# Altium PCB MB1360.PcbDoc (part 1 of 3)
Units mil, origin at the board's own origin, x right, y up, seen from the top; angles counter-clockwise.
Board outline 2760.94 x 3253.06 mil, 2 copper layers (Top Layer, Bottom Layer), stack 61.811 mil thick; 138 components, 141 nets, 535 pads, 416 vias.
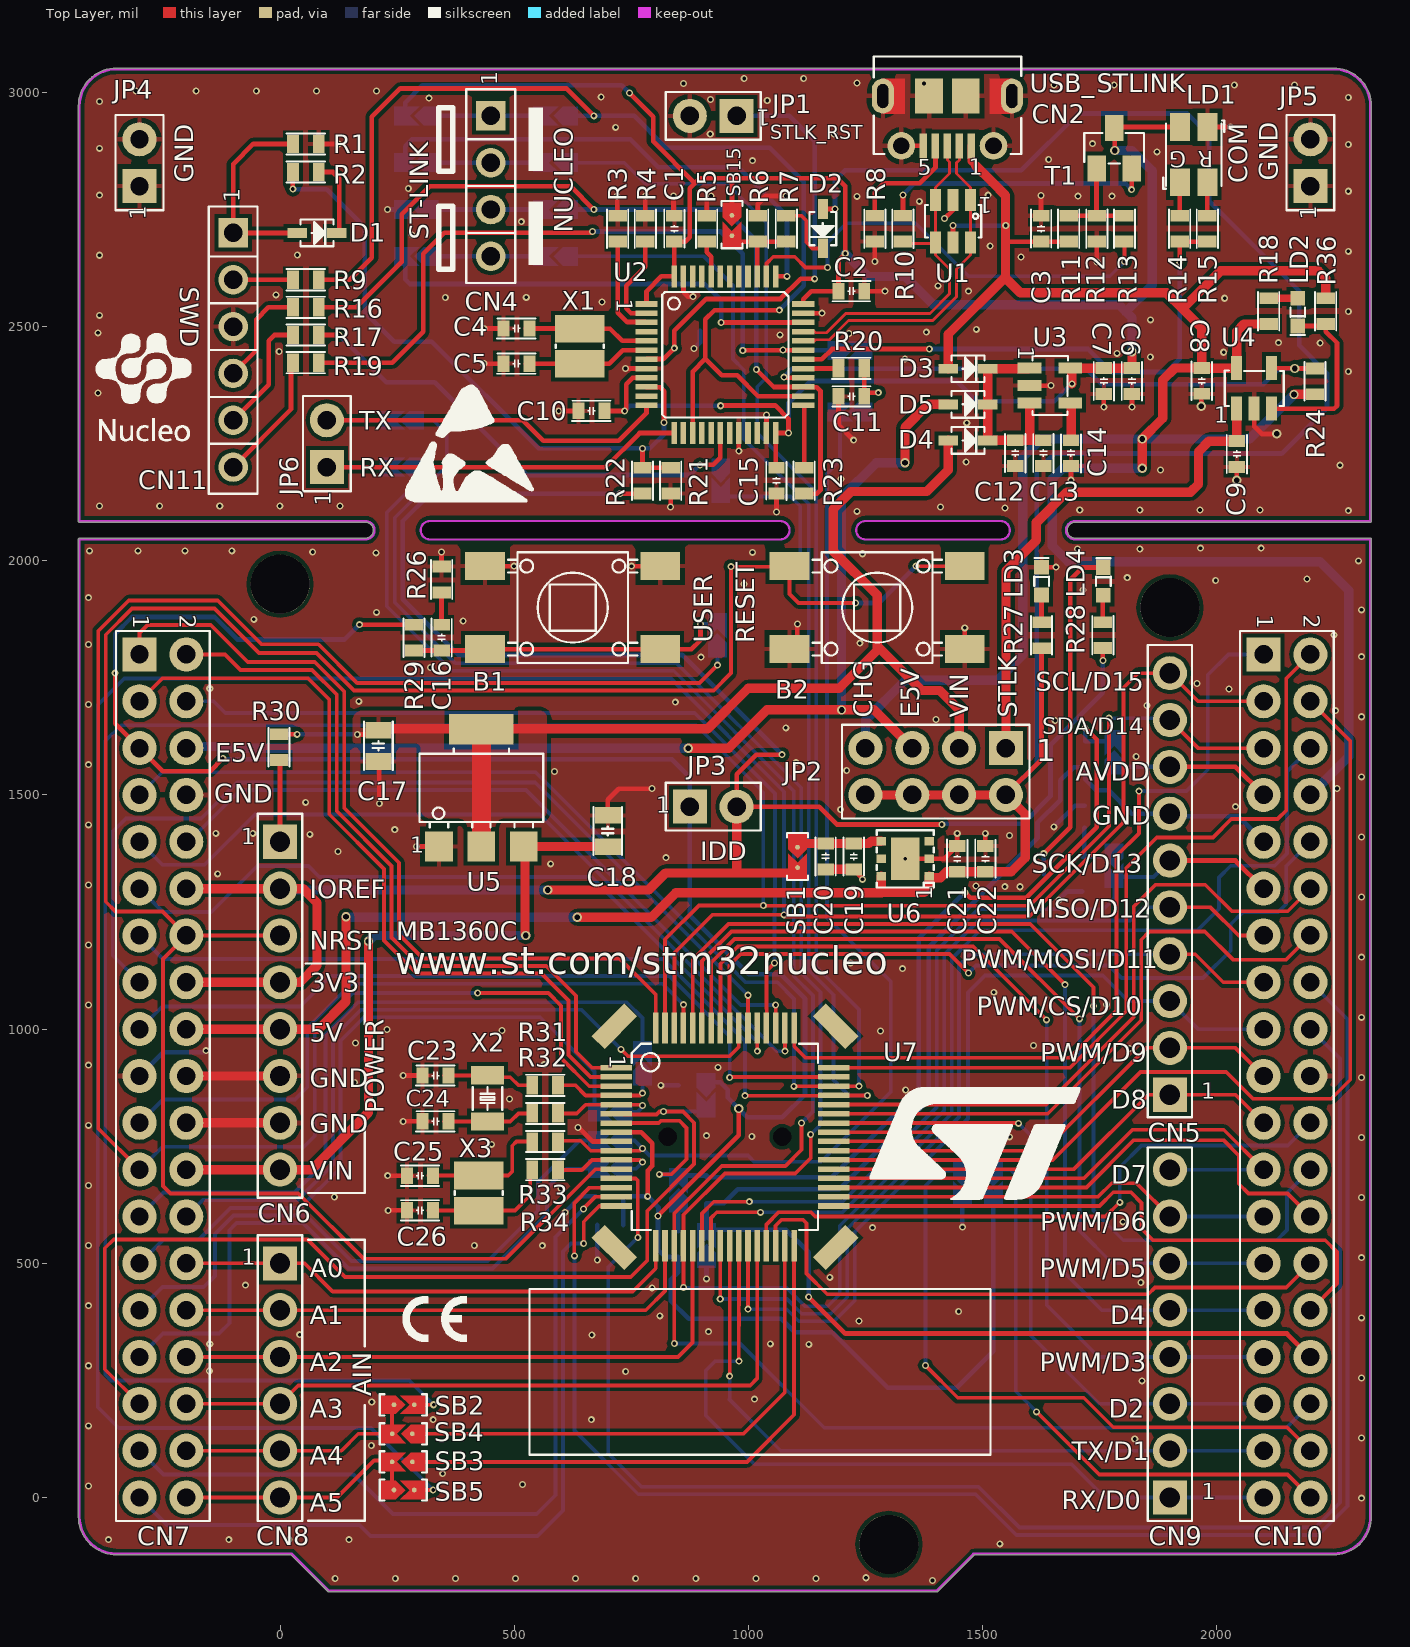
[diagram p0: Top Layer view]
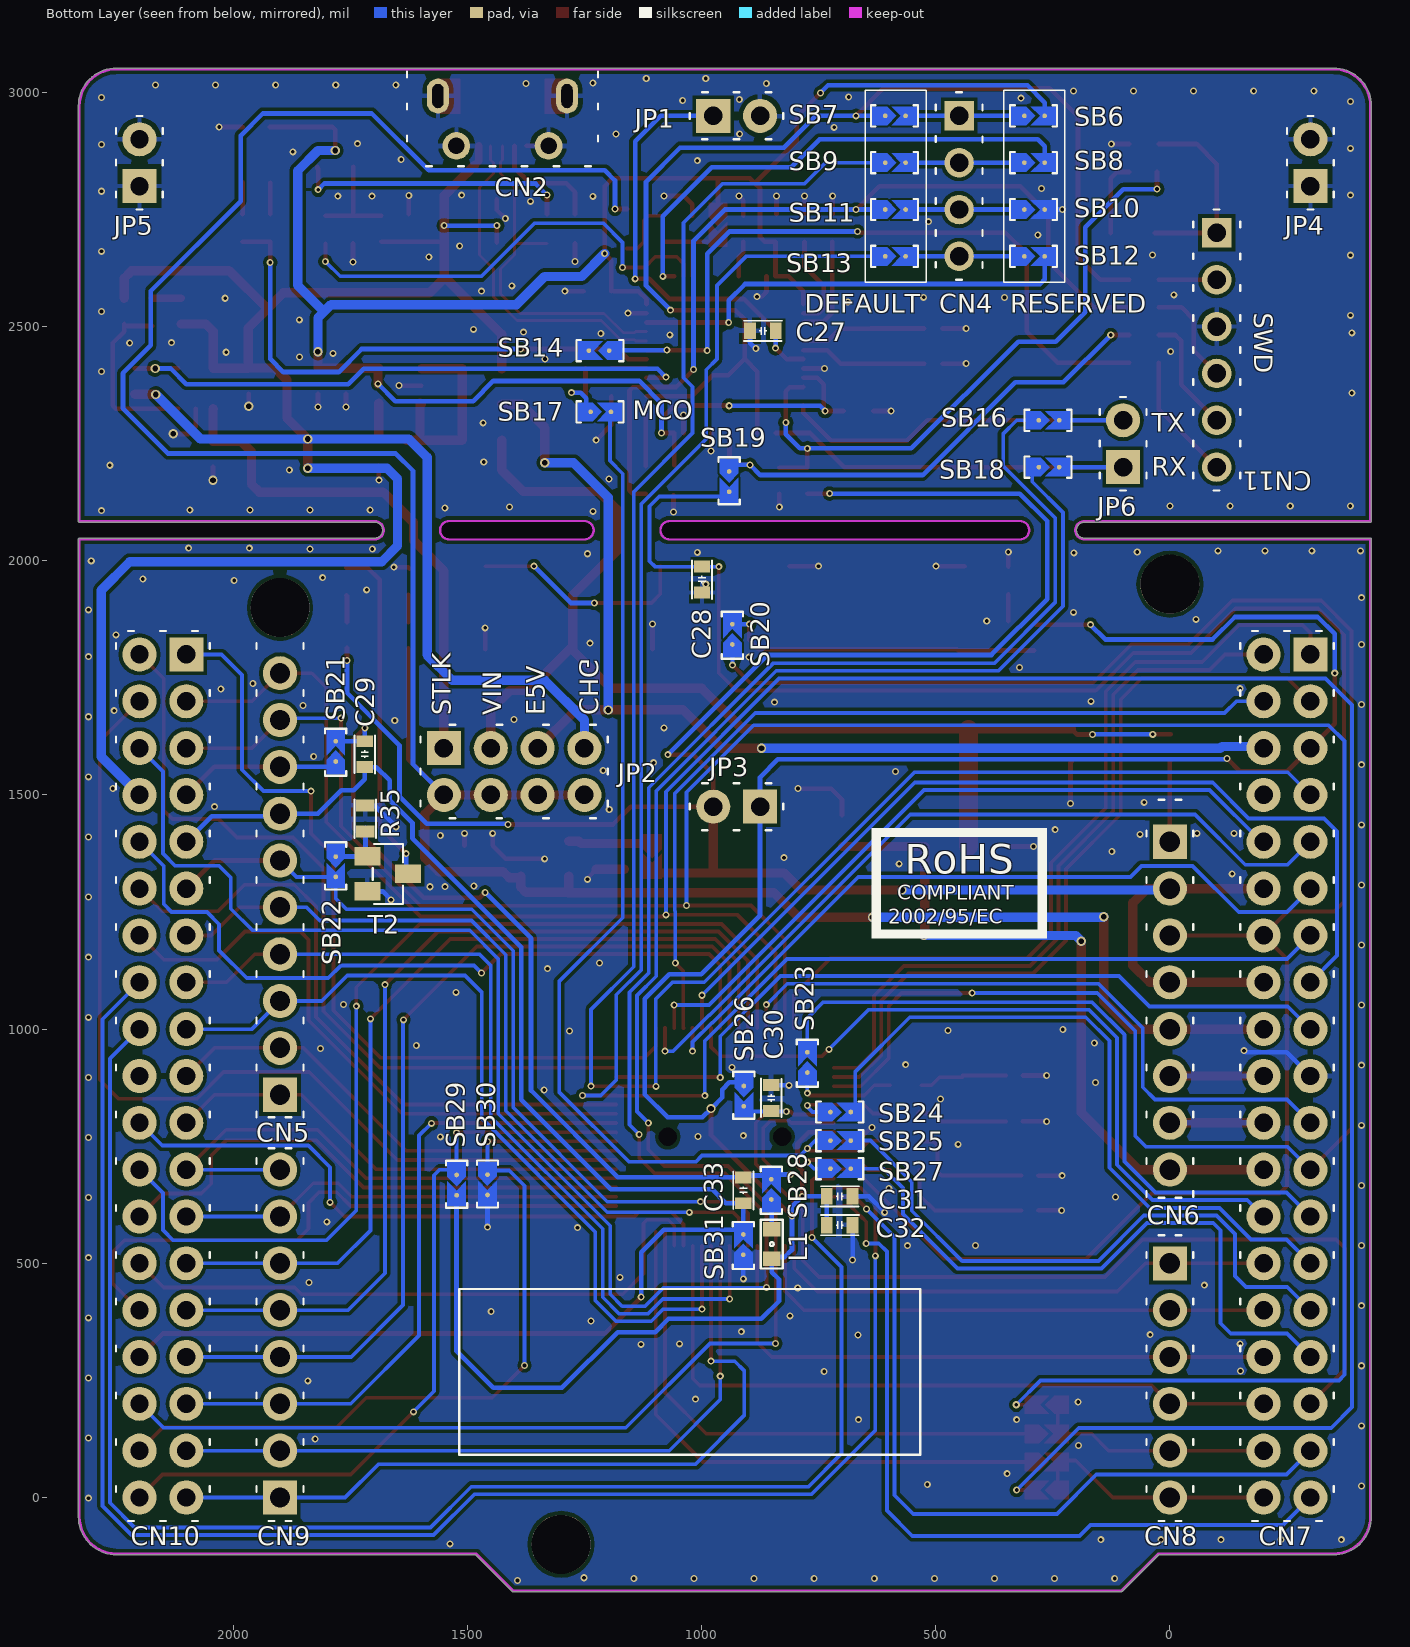
[diagram p1: Bottom Layer view, seen from below]
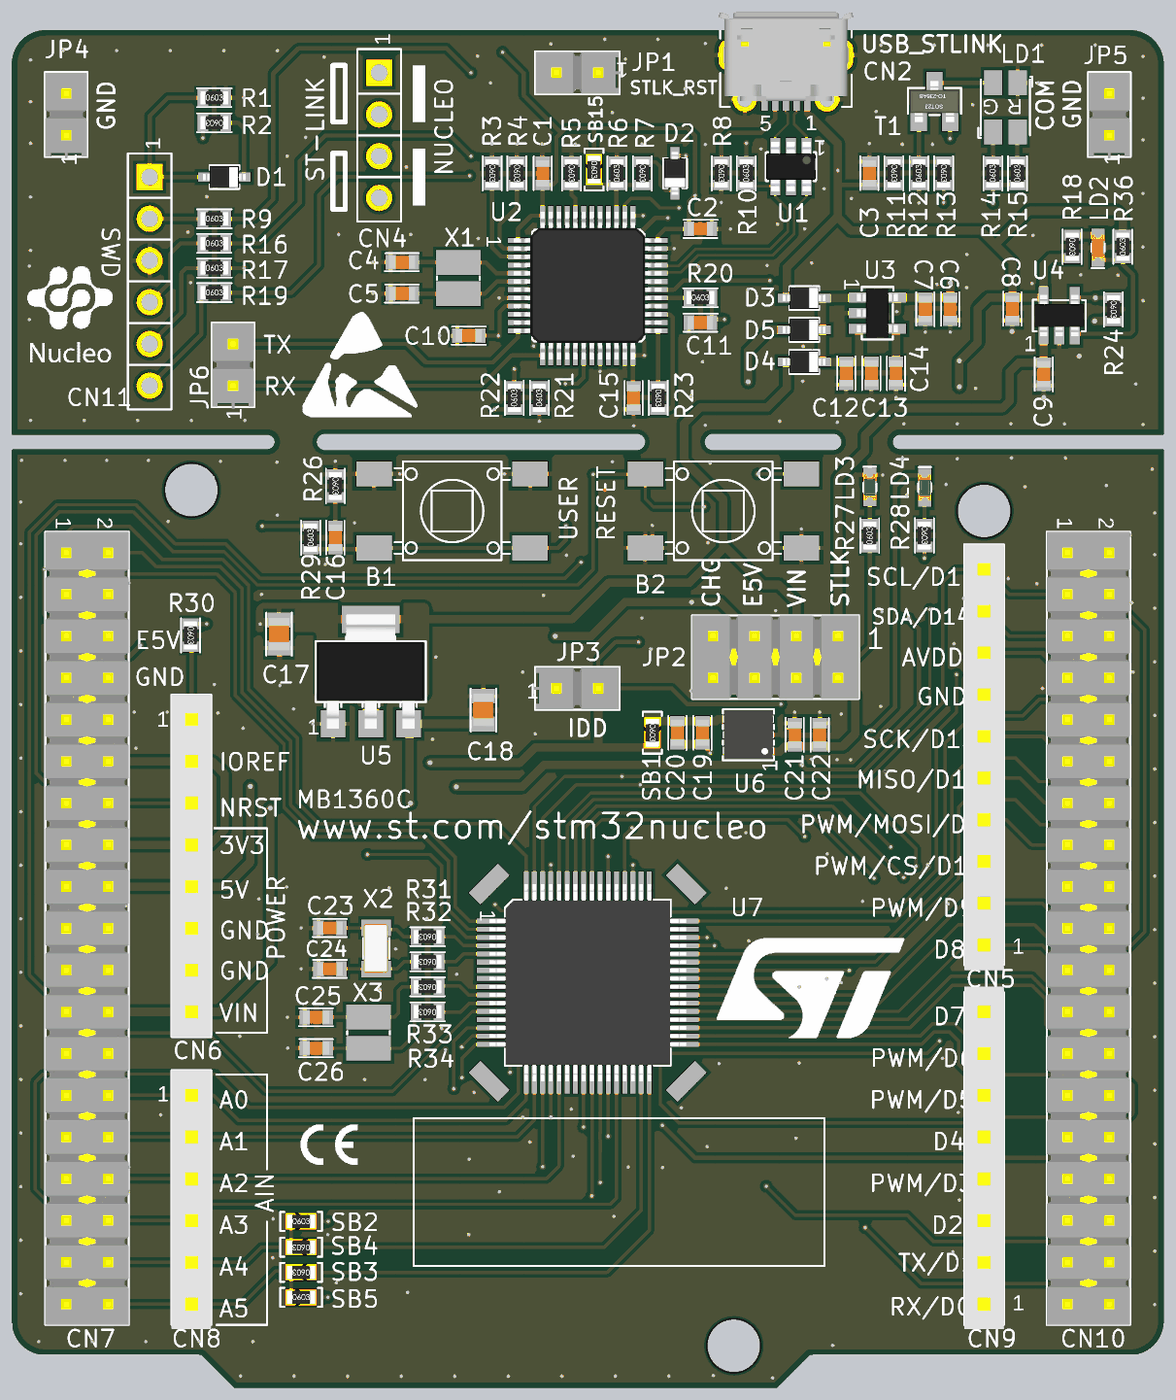
[diagram p3: 3D render of the assembled board from above, using the file's embedded part models]
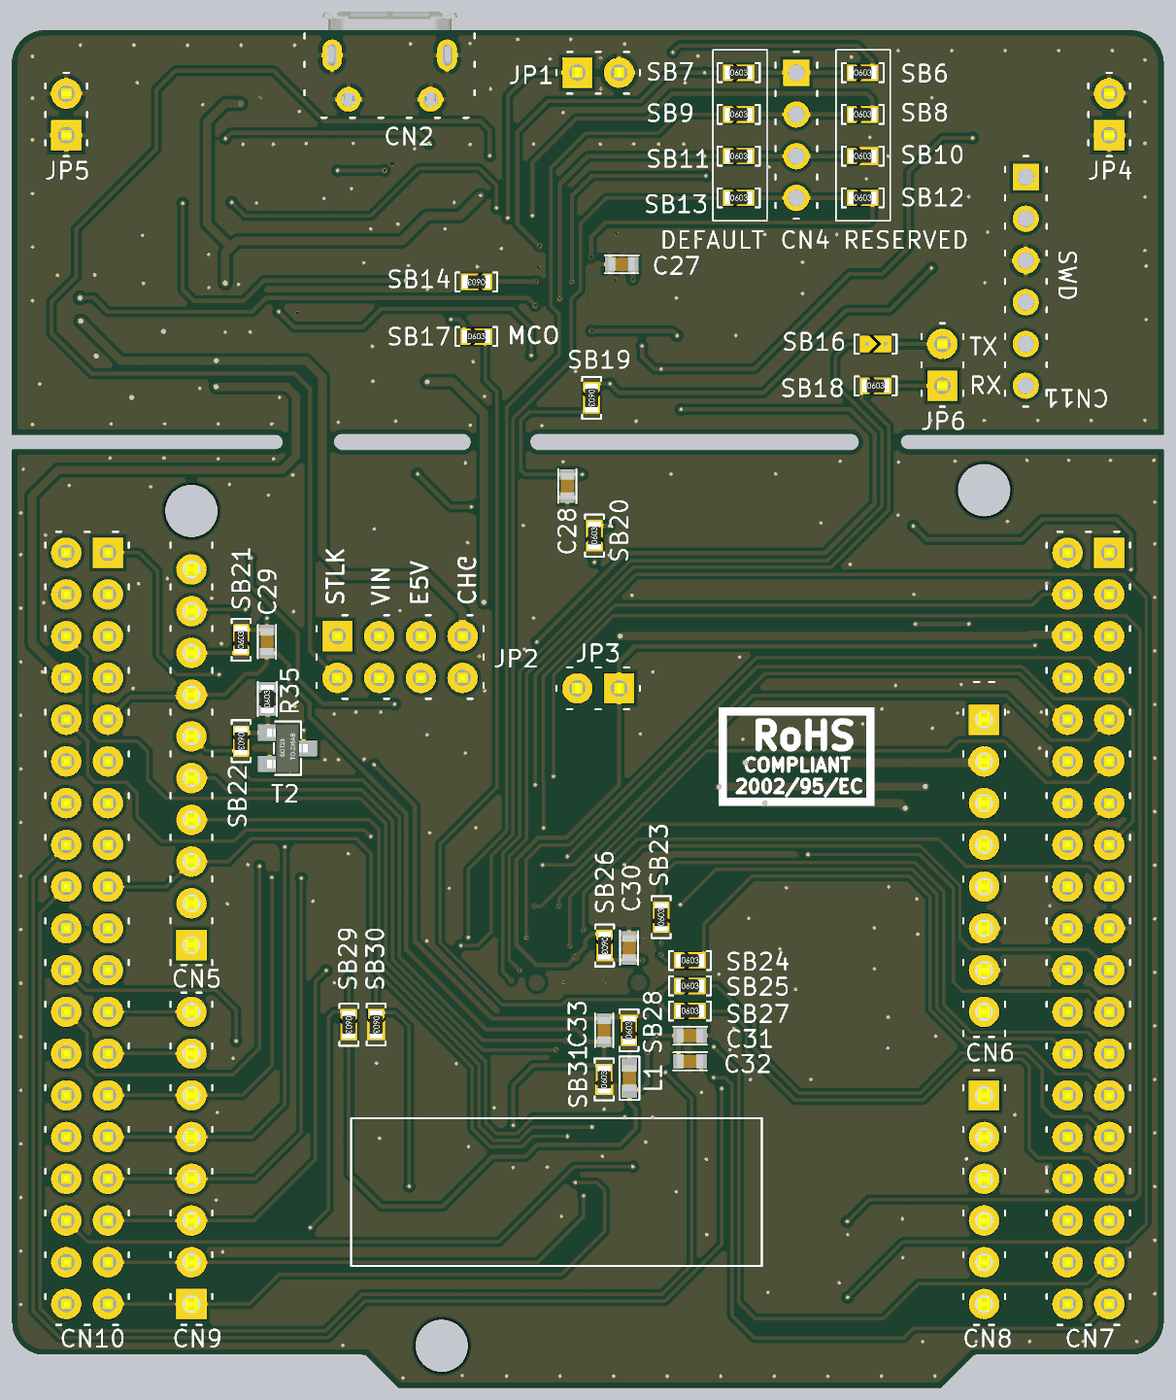
[diagram p4: 3D render of the assembled board from below, using the file's embedded part models]

## Layer stack, top to bottom
Top Solder: solder mask 0.5906, Solder Resist, Dk 3.5
Top Layer: signal copper 1.378
Dielectric1: dielectric 59.0551, FR-4, Dk 4.8
Bottom Layer: signal copper 1.378
Bottom Solder: solder mask 0.5906, Solder Resist, Dk 3.5

## Board outline
-430.46,-40.95 ccw(c-349.21,-40.95) -349.21,-122.2 ccw(c-349.21,-119.69) -349.17,-122.2 23.77,-122.2 101.77,-200.2 ccw(c103.55,-198.43) 103.55,-200.94 1402.76,-200.94 ccw(c1402.76,-198.43) 1404.54,-200.2 1404.55,-200.19 cw(c1402.76,-198.43) 1404.53,-200.21 1482.54,-122.2 2249.22,-122.2 ccw(c2249.22,-40.95) 2330.47,-40.95 2330.47,2045.67 ccw(c2327.96,2045.67) 2327.96,2048.18 1698.04,2048.18 cw(c1698.04,2065.35) 1698.04,2082.52 2327.93,2082.52 ccw(c2327.96,2085.04) 2330.47,2085.04 2330.47,2970.87 ccw(c2249.22,2970.87) 2249.24,3052.12 ccw(c2249.22,2970.87) 2249.22,3052.12 cw(c2249.22,3049.61) 2249.24,3052.12 2249.22,3052.12 -349.21,3052.12 ccw(c-349.21,3049.61) -349.23,3052.12 cw(c-349.21,2970.87) -349.21,3052.12 -349.23,3052.12 ccw(c-349.21,2970.87) -430.46,2970.87 -430.46,2085.04 ccw(c-427.95,2085.04) -427.92,2082.52 182.29,2082.52 cw(c182.29,2065.35) 199.46,2065.35 cw(c182.29,2065.35) 182.29,2048.18 -427.95,2048.18 ccw(c-427.95,2045.67) -430.46,2045.65
cut-out: 320.08,2045.67 1068.11,2045.67 ccw(c1068.11,2065.35) 1068.11,2085.04 320.08,2085.04 ccw(c320.08,2065.35)
cut-out: 1250,2045.67 1538.59,2045.67 ccw(c1538.59,2065.35) 1538.59,2085.04 1250,2085.04 ccw(c1250,2065.35)

## Design rules (kind name [scope] priority, off if disabled: settings)
Clearance SB [(HasFootprint('SOLDER-BRIDGE_R0603-0R'))] p1: gap=5 ignorepadtopadclearanceinfootprint=FALSE except(0: Arc-Hole Track-Hole SMDPad-Hole THPad-Hole Via-Hole Fill-Hole Poly-Hole Region-Hole Text-Hole)
Clearance U2 [(ObjectKind = 'Pad') And (Component = 'U2') vs (ObjectKind = 'Pad') And (Component = 'U2')] p2: gap=7.8 ignorepadtopadclearanceinfootprint=FALSE except(0: Arc-Hole Track-Hole SMDPad-Hole THPad-Hole Via-Hole Fill-Hole Poly-Hole Region-Hole Text-Hole)
Clearance U7 [(ObjectKind = 'Pad') And (Component = 'U7') vs (ObjectKind = 'Pad') And (Component = 'U7')] p3: gap=7.8 ignorepadtopadclearanceinfootprint=FALSE except(0: Arc-Hole Track-Hole SMDPad-Hole THPad-Hole Via-Hole Fill-Hole Poly-Hole Region-Hole Text-Hole)
Clearance [All] p4: gap=8 ignorepadtopadclearanceinfootprint=FALSE except(0: Arc-Hole Track-Hole SMDPad-Hole THPad-Hole Via-Hole Fill-Hole Poly-Hole Region-Hole Text-Hole)
ComponentClearance [All] p1: gap=7.87 collisioncheckmode=3 verticalgap=7.87 showdistances=FALSE
DiffPairsRouting [All] p1: maxlimit=8.9 minlimit=8.9 mostfreqgap=8.9 toplayer_minwidth=15 toplayer_maxwidth=15 toplayer_prefwidth=15 bottomlayer_minwidth=15 bottomlayer_maxwidth=15 bottomlayer_prefwidth=15 maxuncoupledlength=500
HoleSize [All] p1: absolutevalues=TRUE maxlimit=150 minlimit=1 maxpercent=80.000 minpercent=20.000
MinimumSolderMaskSliver [All] p1: minsoldermaskwidth=0
PolygonConnect VIA [IsVia] p1: connectstyle=Direct reliefconductorwidth=10 reliefentries=4 polygonreliefangle="90 Angle" airgapwidth=10
PolygonConnect [All] p2: connectstyle=Relief reliefconductorwidth=10 reliefentries=4 polygonreliefangle="90 Angle" airgapwidth=10
RoutingVias [All] p1: holewidth=12 width=20 viastyle="Through Hole" minholewidth=8 minwidth=15 maxholewidth=28 maxwidth=50
SilkToSilkClearance [All] p1: silktosilkclearance=4
SilkToSolderMaskClearance [IsPad] p1: minsilkscreentomaskgap=0.5 clearancetoexposedcopper=TRUE
SolderMaskExpansion [All] p1: expansion=4
Width [All] p1: maxlimit=40 minlimit=6 preferedwidth=10 minimp=50.000000 maximp=50.000000 favimp=50.000000
24 further rules are at their usual default settings.

## Classes and differential pairs
net class PF[0..2]: PF0 PF1 PF2 PF3 PF4
net class PD[0..9]: PD0 PD1 PD2 PD3 PD4 PD5 PD6 PD7 PD8 PD9
net class PC[0..15]: PC0 PC1 PC2 PC3 PC4 PC5 PC6 PC7 PC8 PC9 PC10 PC11 PC12 PC13 PC14 PC15
net class PB[0..15]: PB0 PB1 PB2 PB3 PB4 PB5 PB6 PB7 PB8 PB9 PB10 PB11 PB12 PB13 PB14 PB15
net class PA[0..15]: PA0 PA1 PA2 PA3 PA4 PA5 PA6 PA7 PA8 PA9 PA10 PA11 PA12 PA13 PA14 PA15
component class Power: C17 C18 C19 C20 C21 C22 HW12 HW13 JP2 JP3 LD3 R27 SB1 U5 U6
component class ST_LINK_V2-1: C1 C2 C3 C4 C5 C6 C7 C8 C9 C10 C11 C12 C13 C14 C15 C27 CN2 CN4 CN10 D1 D2 D3 D4 D5 HW6 HW7 HW8 HW9 JP1 JP4 JP5 JP6 LD1 LD2 R1 R2 R3 R4 R5 R6 R7 R8 R9 R10 R11 R12 R13 R14 R15 R16 R17 R18 R19 R20 R21 R22 R23 R24 R36 SB6 SB7 SB8 SB9 SB10 SB11 SB12 SB13 SB14 SB15 SB16 SB17 SB18 SB19 T1 U1 U2 U3 U4 X1
component class MCU: B1 B2 C16 C23 C24 C25 C26 C28 HW10 HW11 R26 R29 R31 R32 R33 R34 SB20 SB29 SB30 U7 X2 X3
component class Connectors: C29 CN5 CN6 CN7 CN8 CN10 LD4 R28 R30 R35 SB2 SB3 SB4 SB5 SB21 SB22 SB23 SB24 SB25 SB27 T2
component class HW_Mechanical_Parts: HW1 HW2 HW3 HW4 HW5
component class STM32_microcontroller_power: C30 C31 C32 C33 L1 SB26 SB28 SB31
differential pair STL_USB_D: +STL_USB_D_P -STL_USB_D_N

## Components (designator, comment, footprint, x,y, rotation, side; value= is the part's Value field where it differs from the comment)
B1 "SW-PUSH-CMS_BLUE" SWI_WEALTHMETAL_TD-0341_4P_BLUE 625,1900 r270 top locked value=SW_BLUE
B2 "SW-PUSH-CMS_BLACK" SWI_WEALTHMETAL_TD-0341_4P_BLACK 1275,1900 r90 top locked value=SW_BLACK
C1 "Capacitor" C0603 842,2709 r270 top value=100nF
C2 "Capacitor" C0603 1220,2575.68 r180 top value=100nF
C3 "Capacitor" C0603 1625,2709 r270 top value=100nF
C4 "Capacitor" C0603 505,2496 r0 top value=10pF
C5 "Capacitor" C0603 505,2421 r0 top value=10pF
C6 "Capacitor" C0603 1819.02,2383.94 r90 top value=100nF
C7 "Capacitor" C0603 1759.02,2383.94 r90 top value=1uF
C8 "Capacitor" C0603 1968,2384 r270 top value=1uF
C9 "Capacitor" C0603 2043,2228 r90 top value=100nF
C10 "Capacitor" C0603 665,2320 r0 top value=100nF
C11 "N/A" C0603 1220,2351 r180 top value=20pF
C12 "Capacitor" C0603 1569.87,2230 r90 top value=100nF
C13 "Capacitor" C0603 1629.87,2230 r90 top value=1uF
C14 "Capacitor" C0603 1688.87,2229.94 r90 top value=10nF
C15 "Capacitor" C0603 1060,2171 r90 top value=100nF
C16 "Capacitor" C0603 345,1836 r270 top value=100nF
C17 "Capacitor" C0805 210,1605 r90 top value=10uF
C18 "Capacitor" C0805 700,1423 r270 top value=10uF
C19 "Capacitor" C0603 1225,1368.69 r90 top value=1uF
C20 "Capacitor" C0603 1165,1368.69 r90 top value=100nF
C21 "Capacitor" C0603 1446,1363.69 r270 top value=100nF
C22 "Capacitor" C0603 1506,1363.69 r270 top value=1uF
C23 "Capacitor" C0603 332,901 r0 top value=5.6pF
C24 "Capacitor" C0603 332,803 r0 top value=5.6pF
C25 "N/A" C0603 299,687 r0 top value=10pF
C26 "N/A" C0603 299,613 r0 top value=10pF
C27 "Capacitor" C0603 869,2491 r0 bottom value=100nF
C28 "Capacitor" C0603 999,1959.97 r90 bottom value=100nF
C29 "N/A" C0603 1719,1587.06 r90 bottom value=100nF
C30 "Capacitor" C0603 851,852.94 r270 bottom value=1uF
C31 "Capacitor" C0603 705,643 r0 bottom value=100nF
C32 "Capacitor" C0603 705,581.62 r0 bottom value=4.7uF
C33 "Capacitor" C0603 910.75,655.97 r90 bottom value=100nF
CN2 "USB_uB_105017.0001" CON_USBMICROB_MOLEX_105017-0001_H2P90 1425,3049.39 r180 top locked value=USB_uB_105017-0001
CN4 "Header 4x1" CON_988-JIUBABA_PHFS25-11-04-G0B115-T-1 450,2800 r90 top
CN5 "Socket 10x1" CON_SAMTEC_SSW-110-03-X-S 1900,1310 r90 top
CN6 "Socket 8x1" CON_SAMTEC_SSW-108-03-X-S 0,1050 r270 top locked
CN7 "Header 19x2" CON_SAMTEC_TSW-119-09-X-D -250,900 r270 top
CN8 "Socket 6x1" CON_SAMTEC_SSW-106-03-X-S 0,250 r270 top
CN9 "Socket 8x1" CON_SAMTEC_SSW-108-03-X-S 1900,350 r90 top
CN10 "Header 19x2" CON_SAMTEC_TSW-119-09-X-D 2150,900 r270 top
CN11 "Header 6x1" CON_988-JIUBABA_PHFS25-11-06-G0B115-T-1 -100,2450 r90 top locked value="Header 1x6"
D1 "BAT60JFILM" DIO_SOD323 79,2700 r0 top
D2 "BAT60JFILM" DIO_SOD323 1159,2709 r270 top
D3 "BAT60JFILM" DIO_SOD323 1469,2410 r0 top locked
D4 "BAT60JFILM" DIO_SOD323 1469,2257 r0 top
D5 "BAT60JFILM" DIO_SOD323 1469,2334 r0 top
JP1 "Jumper Header 2x1" CON_SAMTEC_TSW-102-07-G-S 925,2950 r180 top value=Jumper_Header_2x1
JP2 "Shunt Fitted 1-2" CON_SAMTEC_TSW-104-07-X-D 1400,1550 r180 top
JP3 "Shunt Fitted" CON_SAMTEC_TSW-102-07-G-S 925,1475 r0 top
JP4 "Shunt Fitted" CON_SAMTEC_TSW-102-07-G-S -300,2850 r90 top locked
JP5 "Shunt Fitted" CON_SAMTEC_TSW-102-07-G-S 2200,2850 r90 top locked
JP6 "Jumper Header 2x1" CON_SAMTEC_TSW-102-07-G-S 100,2250 r90 top locked value=Jumper_Header_2x1
L1 "BEAD" L0603 850,541 r90 bottom value=600R@100MHz
LD1 "LD_BICOLOR_CMS" LED_BI-GR_HSMF-A201-A00J1 1951,2867 r180 top locked
LD2 "LED_red" LED_0603_RED 2173,2531 r270 top value=RED
LD3 "LED_green" LED_0603_GREEN 1626,1956.7 r90 top value=GREEN
LD4 "LED_green" LED_0603_GREEN 1758,1956 r90 top value=GREEN
R1 "Resistor" R0603 55,2890 r0 top value=10K
R2 "N/A" R0603 55,2830 r180 top value=22R
R3 "N/A" R0603 721,2709 r270 top value=10K
R4 "Resistor" R0603 780,2709 r270 top value=10K
R5 "Resistor" R0603 911,2709 r270 top value=100K
R6 "Resistor" R0603 1020,2709 r90 top value=4K7
R7 "Resistor" R0603 1081,2709 r270 top value=2K7
R8 "Resistor" R0603 1270,2709 r270 top value=100K
R9 "Resistor" R0603 55,2600 r0 top value=22R
R10 "Resistor" R0603 1330,2709 r90 top value=1K5
R11 "Resistor" R0603 1684,2709 r270 top value=10K
R12 "Resistor" R0603 1744,2709 r90 top value=36K
R13 "Resistor" R0603 1803,2709 r270 top value=100R
R14 "Resistor" R0603 1921,2709 r90 top value=330R
R15 "Resistor" R0603 1980,2709 r90 top value=330R
R16 "Resistor" R0603 55,2541 r0 top value=22R
R17 "Resistor" R0603 55,2482 r0 top value=22R
R18 "Resistor" R0603 2111,2533 r270 top value=1K
R19 "Resistor" R0603 55,2423 r0 top value=22R
R20 "Resistor" R0603 1220,2411 r0 top value=100R
R21 "Resistor" R0603 834,2171 r90 top value=4K7
R22 "Resistor" R0603 774,2171 r90 top value=4K7
R23 "Resistor" R0603 1119,2171 r270 top value=100R
R24 "Resistor" R0603 2210,2383 r270 top value=47K
R26 "Resistor" R0603 345,1960 r270 top value=100R
R27 "Resistor" R0603 1626,1841 r90 top value=1K
R28 "Resistor" R0603 1757,1841.3 r270 top value=510R
R29 "Resistor" R0603 286,1836 r90 top value=4K7
R30 "Resistor" R0603 -2,1602 r270 top value=1K
R31 "Resistor" R0603 566,880 r180 top value=0R
R32 "Resistor" R0603 566,820 r180 top value=0R
R33 "N/A" R0603 566,760 r180 top locked value=100R
R34 "N/A" R0603 566,700 r180 top locked value=100R
R35 "Resistor" R0603 1718,1449.62 r90 bottom value=1M
R36 "Resistor" R0603 2232.64,2533 r90 top value=47K
SB1 "SB_ON" SOLDER-BRIDGE_R0603-0R 1105,1368.69 r270 top
SB2 "SB_OFF" SOLDER-BRIDGE_R0603-0R 263,198 r0 top
SB3 "SB_ON" SOLDER-BRIDGE_R0603-0R 263,76 r180 top
SB4 "SB_ON" SOLDER-BRIDGE_R0603-0R 263,136 r180 top
SB5 "SB_OFF" SOLDER-BRIDGE_R0603-0R 263,16 r0 top
SB6 "SB_OFF" SOLDER-BRIDGE_R0603-0R 291,2950 r180 bottom
SB7 "SB_ON" SOLDER-BRIDGE_R0603-0R 588,2950 r180 bottom
SB8 "SB_OFF" SOLDER-BRIDGE_R0603-0R 291,2850 r180 bottom locked
SB9 "SB_ON" SOLDER-BRIDGE_R0603-0R 588,2850 r180 bottom
SB10 "SB_OFF" SOLDER-BRIDGE_R0603-0R 291,2750 r180 bottom locked
SB11 "SB_ON" SOLDER-BRIDGE_R0603-0R 588,2750 r180 bottom
SB12 "SB_OFF" SOLDER-BRIDGE_R0603-0R 291,2650 r180 bottom
SB13 "SB_ON" SOLDER-BRIDGE_R0603-0R 588,2650 r180 bottom
SB14 "SB_ON" SOLDER-BRIDGE_R0603-0R 1216.85,2448.76 r0 bottom
SB15 "SB_OFF" SOLDER-BRIDGE_R0603-0R 965,2717.72 r270 top
SB16 "SB_ON" SOLDER-BRIDGE_R0603-0R 260,2300 r180 bottom
SB17 "SB_ON" SOLDER-BRIDGE_R0603-0R 1217,2318 r180 bottom
SB18 "SB_ON" SOLDER-BRIDGE_R0603-0R 260,2200 r180 bottom
SB19 "SB_ON" SOLDER-BRIDGE_R0603-0R 941,2171 r270 bottom
SB20 "SB_ON" SOLDER-BRIDGE_R0603-0R 934.11,1841 r90 bottom
SB21 "SB_OFF" SOLDER-BRIDGE_R0603-0R 1781,1591.06 r90 bottom
SB22 "SB_ON" SOLDER-BRIDGE_R0603-0R 1781,1348.62 r270 bottom
SB23 "SB_OFF" SOLDER-BRIDGE_R0603-0R 774,927 r90 bottom
SB24 "SB_OFF" SOLDER-BRIDGE_R0603-0R 705,823 r180 bottom
SB25 "SB_ON" SOLDER-BRIDGE_R0603-0R 705,762 r180 bottom
SB26 "SB_ON" SOLDER-BRIDGE_R0603-0R 909.76,858.94 r270 bottom
SB27 "SB_ON" SOLDER-BRIDGE_R0603-0R 705,702 r180 bottom
SB28 "SB_ON" SOLDER-BRIDGE_R0603-0R 851,656 r90 bottom
SB29 "SB_OFF" SOLDER-BRIDGE_R0603-0R 1523,669 r270 bottom
SB30 "SB_OFF" SOLDER-BRIDGE_R0603-0R 1457,669.62 r270 bottom
SB31 "SB_ON" SOLDER-BRIDGE_R0603-0R 910.75,537.97 r90 bottom locked
T1 "9013-SOT23" NPN_SOT23 1781,2881 r0 top locked
T2 "BSN20" MOS_SOT23 1669.69,1331.4 r270 bottom
U1 "USBLC6-2SC6" ESD_SOT23-6L 1437,2725 r180 top locked
U2 "STM32F103CBT6" ICC_LQFP48_7X7_P050 950,2440 r270 top locked
U3 "LDK120M33R" REG_SOT23-5L 1644,2374 r270 top locked
U4 "DFN8 and SO8 are mixed in a single footprint allowing to swap according to components availability" MOS_SOT23-5L 2080,2368 r0 top value=STMPS2141STR
U5 "LD1117S50TR" REG_SOT223-TAB 430,1515 r0 top locked
U6 "LDL112PV33R" ICC_DFN6-EPAD_3X3_P095 1335,1363.69 r90 top
U7 "STM32G071RBT6" ICC_LQFP64_10X10_P050_SOCKET_YAMAICHI_IC149-064-069-B5 950,770 r270 top locked
X1 "XTAL_8M_NX3225GD" CRY_NX3225GD_2P 640,2458 r270 top locked value=NX3225GD-8.00M
X2 "XTAL_32K_NX3215SA" CRY_NX3215SA_2P 443,852 r90 top value=NX3215SA-32.768K
X3 "N/A" CRY_NX3225GD_2P 424.5,650 r90 top value=NX3225GD-8.00M

## Footprints (in the part's own frame and the unit in brackets; to place one, negate y for a bottom-side part, rotate by r counter-clockwise, add the part's x,y. Pads: shape width x height; smd on the part's side, far side on the other; paste and mask are expansions set on the pad)
C0603 [mm]
  rect 0.64x0.89 smd mask+0.05: 1(-0.7,0) 2(0.7,0)
  silkscreen extent -1.05,-0.55 1.02,0.55, body extent -0.9,-0.5 0.9,0.5, height 1.4
C0805 [mm]
  rect 0.9x1.4 smd mask+0.05: 1(-0.85,0) 2(0.85,0)
  silkscreen extent -1.3,-0.77 1.3,0.77, body extent -1.1,-0.7 1.1,0.7, height 1.35
CON_988-JIUBABA_PHFS25-11-04-G0B115-T-1 [mm]
  rect 1.6x1.6 hole 1 mask+0.05: 1(3.81,0)
  round 1.6 hole 1 mask+0.05: 2(1.27,0) 3(-1.27,0) 4(-3.81,0)
  silkscreen extent -5.25,-1.33 5.25,1.33, body extent -5.25,-1.33 5.25,1.33, height 8.85
CON_988-JIUBABA_PHFS25-11-06-G0B115-T-1 [mm]
  rect 1.6x1.6 hole 1 mask+0.05: 1(6.35,0)
  round 1.6 hole 1 mask+0.05: 2(3.81,0) 3(1.27,0) 4(-1.27,0) 5(-3.81,0) 6(-6.35,0)
  silkscreen extent -7.79,-1.33 7.79,1.33, body extent -7.79,-1.33 7.79,1.33, height 8.85
CON_SAMTEC_SSW-106-03-X-S [mm]
  rect 1.85x1.85 / inner round 1.85 / far side rect 1.85x1.85 hole 1.1 mask+0.05: 1(-6.35,0)
  round 1.85 hole 1.1 mask+0.05: 2(-3.81,0) 3(-1.27,0) 4(1.27,0) 5(3.81,0) 6(6.35,0)
  silkscreen extent -7.88,-1.2 7.62,1.2, body extent -7.88,-1.21 7.88,1.21, height 8.51
CON_SAMTEC_SSW-108-03-X-S [mm]
  rect 1.85x1.85 / inner round 1.85 / far side rect 1.85x1.85 hole 1.1 mask+0.05: 1(-8.89,0)
  round 1.85 hole 1.1 mask+0.05: 2(-6.35,0) 3(-3.81,0) 4(-1.27,0) 5(1.27,0) 6(3.81,0) 7(6.35,0) 8(8.89,0)
  silkscreen extent -10.42,-1.2 10.42,1.2, body extent -10.42,-1.21 10.42,1.21, height 8.51
CON_SAMTEC_SSW-110-03-X-S [mm]
  rect 1.85x1.85 / inner round 1.85 / far side rect 1.85x1.85 hole 1.1 mask+0.05: 1(-11.43,0)
  round 1.85 hole 1.1 mask+0.05: 2(-8.89,0) 3(-6.35,0) 4(-3.81,0) 5(-1.27,0) 6(1.27,0) 7(3.81,0) 8(6.35,0) 9(8.89,0) 10(11.43,0)
  silkscreen extent -12.65,-1.2 12.96,1.2, body extent -12.96,-1.21 12.96,1.21, height 8.51
CON_SAMTEC_TSW-102-07-G-S [mm]
  rect 1.85x1.85 / inner round 1.85 / far side rect 1.85x1.85 hole 1 mask+0.05: 1(-1.27,0)
  round 1.85 hole 1 mask+0.05: 2(1.27,0)
  silkscreen extent -2.58,-1.3 2.58,1.3, body extent -2.67,-1.3 2.58,1.3, height 8.38
CON_SAMTEC_TSW-104-07-X-D [mm]
  rect 1.85x1.85 / inner round 1.85 / far side rect 1.85x1.85 hole 1 mask+0.05: 1(-3.81,-1.27)
  round 1.85 hole 1 mask+0.05: 2(-3.81,1.27) 3(-1.27,-1.27) 4(-1.27,1.27) 5(1.27,-1.27) 6(1.27,1.27) 7(3.81,-1.27) 8(3.81,1.27)
  silkscreen extent -5.08,-2.54 5.08,2.54, body extent -5.08,-2.54 5.08,2.54, height 8.38
CON_SAMTEC_TSW-119-09-X-D [mm]
  rect 1.85x1.85 / inner round 1.85 / far side rect 1.85x1.85 hole 1 mask+0.05: 1(-22.86,-1.27)
  round 1.85 hole 1 mask+0.05: 2(-22.86,1.27) 3(-20.32,-1.27) 4(-20.32,1.27) 5(-17.78,-1.27) 6(-17.78,1.27) 7(-15.24,-1.27) 8(-15.24,1.27) 9(-12.7,-1.27) 10(-12.7,1.27) 11(-10.16,-1.27) 12(-10.16,1.27) 13(-7.62,-1.27) 14(-7.62,1.27) 15(-5.08,-1.27) 16(-5.08,1.27) 17(-2.54,-1.27) 18(-2.54,1.27) 19(0,-1.27) 20(0,1.27) 21(2.54,-1.27) 22(2.54,1.27) 23(5.08,-1.27) 24(5.08,1.27) 25(7.62,-1.27) 26(7.62,1.27) 27(10.16,-1.27) 28(10.16,1.27) 29(12.7,-1.27) 30(12.7,1.27) 31(15.24,-1.27) 32(15.24,1.27) 33(17.78,-1.27) 34(17.78,1.27) 35(20.32,-1.27) 36(20.32,1.27) 37(22.86,-1.27) 38(22.86,1.27)
  silkscreen extent -24.13,-2.54 24.13,2.54, body extent -24.13,-2.55 24.13,2.54, height 8.38
CON_USBMICROB_MOLEX_105017-0001_H2P90 [mm]
  rect 0.4x1.35 smd mask+0.05: 1(-1.3,4.15) 2(-0.65,4.15) 3(0,4.15) 4(0.65,4.15) 5(1.3,4.15)
  round 1.5 hole 0.9 mask+0.05: 6(-2.5,4.15) 7(2.5,4.15)
  oval 1.2x1.9 hole 0.6 slot 1.3 at 90 deg mask+0.05: 8(3.5,1.45) 9(-3.5,1.45)
  rect 1.5x1.9 smd mask+0.05: 10(-1,1.45) 11(1,1.45)
  Top Layer region: -3.5,2.4 -2.3,2.4 -2.3,0.5 -3.5,0.5 -3.5,2.4
  Top Layer region: 2.3,2.4 3.5,2.4 3.5,0.5 2.3,0.5 2.3,2.4
  silkscreen extent -4,-0.7 4,4.6, body extent -4.1,-1.15 4.1,4.66, height 2.9
CRY_NX3215SA_2P [mm]
  rect 1x1.8 smd mask+0.05: 1(-1.25,0) 2(1.25,0)
  silkscreen extent -0.63,-0.8 0.63,0.8, body extent -1.65,-0.8 1.65,0.8, height 0.9
CRY_NX3225GD_2P [mm]
  rect 1.5x2.7 smd mask+0.05: 1(-0.95,0) 2(0.95,0)
  silkscreen extent -0.1,-1.3 0.1,1.3, body extent -1.65,-1.3 1.65,1.3, height 1
DIO_SOD323 [mm]
  rect 1.06x0.54 smd mask+0.05: 1(-1.07,0) 2(1.07,0)
  silkscreen extent -0.9,-0.72 0.9,0.72, body extent -1.3,-0.78 1.3,0.78, height 1.17
ESD_SOT23-6L [mm]
  rect 0.6x1.2 smd mask+0.05: 1(-0.95,-1.15) 2(0,-1.15) 3(0.95,-1.15) 4(0.95,1.15) 5(0,1.15) 6(-0.95,1.15)
  silkscreen extent -1.53,-0.87 1.53,0.87, body extent -1.52,-1.5 1.52,1.5, height 1.45
ICC_DFN6-EPAD_3X3_P095 [mm]
  rect 0.45x0.5 smd mask+0.05: 1(-0.95,-1.3) 2(0,-1.3) 3(0.95,-1.3) 4(0.95,1.3) 5(0,1.3) 6(-0.95,1.3)
  rect 2.286x1.524 smd mask+0.05: EP(0,0)
  silkscreen extent -1.55,-1.55 1.55,1.55, body extent -1.55,-1.55 1.55,1.55, height 1
ICC_LQFP48_7X7_P050 [mm]
  rect 0.3x1.2 smd mask+0.05: 1(-2.75,-4.25) 2(-2.25,-4.25) 3(-1.75,-4.25) 4(-1.25,-4.25) 5(-0.75,-4.25) 6(-0.25,-4.25) 7(0.25,-4.25) 8(0.75,-4.25) 9(1.25,-4.25) 10(1.75,-4.25) 11(2.25,-4.25) 12(2.75,-4.25) 25(2.75,4.25) 26(2.25,4.25) 27(1.75,4.25) 28(1.25,4.25) 29(0.75,4.25) 30(0.25,4.25) 31(-0.25,4.25) 32(-0.75,4.25) 33(-1.25,4.25) 34(-1.75,4.25) 35(-2.25,4.25) 36(-2.75,4.25)
  rect 1.2x0.3 smd mask+0.05: 13(4.25,-2.75) 14(4.25,-2.25) 15(4.25,-1.75) 16(4.25,-1.25) 17(4.25,-0.75) 18(4.25,-0.25) 19(4.25,0.25) 20(4.25,0.75) 21(4.25,1.25) 22(4.25,1.75) 23(4.25,2.25) 24(4.25,2.75) 37(-4.25,2.75) 38(-4.25,2.25) 39(-4.25,1.75) 40(-4.25,1.25) 41(-4.25,0.75) 42(-4.25,0.25) 43(-4.25,-0.25) 44(-4.25,-0.75) 45(-4.25,-1.25) 46(-4.25,-1.75) 47(-4.25,-2.25) 48(-4.25,-2.75)
  silkscreen extent -3.4,-3.4 3.4,3.45, body extent -4.5,-4.5 4.5,4.5, height 1.6
ICC_LQFP64_10X10_P050_SOCKET_YAMAICHI_IC149-064-069-B5 [mm]
  rect 1x2.5 smd rot 135 mask+0.05: 0(-6,6) 0(6,-6)
  rect 1x2.5 smd rot 45 mask+0.05: 0(-6,-6) 0(6,6)
  round 0.5 hole 1 unplated mask+0.05: 0(0,3.1) 0(0,-3.1)
  rect 0.3x1.7 smd mask+0.05: 1(-3.75,-5.9) 2(-3.25,-5.9) 3(-2.75,-5.9) 4(-2.25,-5.9) 5(-1.75,-5.9) 6(-1.25,-5.9) 7(-0.75,-5.9) 8(-0.25,-5.9) 9(0.25,-5.9) 10(0.75,-5.9) 11(1.25,-5.9) 12(1.75,-5.9) 13(2.25,-5.9) 14(2.75,-5.9) 15(3.25,-5.9) 16(3.75,-5.9) 33(3.75,5.9) 34(3.25,5.9) 35(2.75,5.9) 36(2.25,5.9) 37(1.75,5.9) 38(1.25,5.9) 39(0.75,5.9) 40(0.25,5.9) 41(-0.25,5.9) 42(-0.75,5.9) 43(-1.25,5.9) 44(-1.75,5.9) 45(-2.25,5.9) 46(-2.75,5.9) 47(-3.25,5.9) 48(-3.75,5.9)
  rect 1.7x0.3 smd mask+0.05: 17(5.9,-3.75) 18(5.9,-3.25) 19(5.9,-2.75) 20(5.9,-2.25) 21(5.9,-1.75) 22(5.9,-1.25) 23(5.9,-0.75) 24(5.9,-0.25) 25(5.9,0.25) 26(5.9,0.75) 27(5.9,1.25) 28(5.9,1.75) 29(5.9,2.25) 30(5.9,2.75) 31(5.9,3.25) 32(5.9,3.75) 49(-5.9,3.75) 50(-5.9,3.25) 51(-5.9,2.75) 52(-5.9,2.25) 53(-5.9,1.75) 54(-5.9,1.25) 55(-5.9,0.75) 56(-5.9,0.25) 57(-5.9,-0.25) 58(-5.9,-0.75) 59(-5.9,-1.25) 60(-5.9,-1.75) 61(-5.9,-2.25) 62(-5.9,-2.75) 63(-5.9,-3.25) 64(-5.9,-3.75)
  silkscreen extent -5.05,-5.05 5.05,5.05, body extent -12.5,-12.5 12.5,12.5, height 12.6
L0603 [mm]
  rect 0.8x0.95 smd mask+0.05: 1(-0.8,0) 2(0.8,0)
  silkscreen extent -1.33,-0.6 1.33,0.6, body extent -0.87,-0.47 0.87,0.47, height 0.95
LED_0603_GREEN [mm]
  rect 0.8x0.8 smd mask+0.05: 1(-0.75,0) 2(0.75,0)
  silkscreen extent -0.25,-0.4 1.25,0.4, body extent -0.8,-0.4 0.8,0.4, height 0.6
LED_0603_RED [mm]
  rect 0.8x0.8 smd mask+0.05: 1(-0.75,0) 2(0.75,0)
  silkscreen extent -0.25,-0.4 1.25,0.4, body extent -0.8,-0.4 0.8,0.4, height 0.6
LED_BI-GR_HSMF-A201-A00J1 [mm]
  rect 1.1x1.5 smd mask+0.05: 1(-0.75,-1.5) 2(-0.75,1.5) 3(0.75,1.5) 4(0.75,-1.5)
  silkscreen extent -1.65,-1.85 1.65,1.85, body extent -1.5,-1.85 1.5,1.85, height 2.1
MOS_SOT23 [mm]
  rect 1x1.4 smd mask+0.05: 1(-0.95,-1.1) 2(0.95,-1.1) 3(0,1.1)
  silkscreen extent -1.63,-0.82 1.63,0.82, body extent -1.56,-1.25 1.56,1.25, height 1.1
MOS_SOT23-5L [mm]
  rect 0.6x1.3 smd mask+0.05: 1(-0.95,-1.1) 2(0,-1.1) 3(0.95,-1.1) 4(0.95,1.1) 5(-0.95,1.1)
  silkscreen extent -1.6,-0.95 1.6,0.97, body extent -1.52,-1.25 1.52,1.25, height 1.45
NPN_SOT23 [mm]
  rect 1x1.4 smd mask+0.05: 1(-0.95,-1.1) 2(0.95,-1.1) 3(0,1.1)
  silkscreen extent -1.63,-0.82 1.63,0.82, body extent -1.56,-1.25 1.56,1.25, height 1.1
R0603 [mm]
  rect 0.64x1 smd mask+0.05: 1(-0.7,0) 2(0.7,0)
  silkscreen extent -1.05,-0.58 1.05,0.58, body extent -0.9,-0.5 0.9,0.5, height 0.56
REG_SOT23-5L [mm]
  rect 0.6x1.3 smd mask+0.05: 1(-0.95,-1.1) 2(0,-1.1) 3(0.95,-1.1) 4(0.95,1.1) 5(-0.95,1.1)
  silkscreen extent -1.6,-0.95 1.6,0.97, body extent -1.52,-1.25 1.52,1.25, height 1.1
REG_SOT223-TAB [mm]
  rect 1.5x1.65 smd mask+0.05: 1(-2.3,-3.175) 2(0,-3.175) 3(2.3,-3.175)
  rect 3.5x1.65 smd mask+0.05: 4(0,3.175)
  silkscreen extent -3.35,-2.15 3.35,2.12, body extent -3.35,-3.48 3.35,3.48, height 1.8
SOLDER-BRIDGE_R0603-0R [mil]
  round 10 smd: 1(-19.68,0) 2(23.62,0)
  Top Layer region: -47.24,-19.68 -47.24,19.68 -15.75,19.68 3.94,0 -15.75,-19.68 -47.24,-19.68
  Top Layer region: -5.91,19.68 13.78,0 -5.91,-19.68 47.24,-19.68 47.24,19.68 -5.91,19.68
  silkscreen extent -50,-23 50,23, body extent -36,-20 36,20, height 22
SWI_WEALTHMETAL_TD-0341_4P_BLACK [mm]
  rect 1.52x2.16 smd mask+0.05: 1(-2.25,-4.75) 2(-2.25,4.75) 3(2.25,-4.75) 4(2.25,4.75)
  silkscreen extent -3,-3.5 3,3.5, body extent -3,-5.15 3,5.15, height 7.55
SWI_WEALTHMETAL_TD-0341_4P_BLUE [mm]
  rect 1.52x2.16 smd mask+0.05: 1(-2.25,-4.75) 2(-2.25,4.75) 3(2.25,-4.75) 4(2.25,4.75)
  silkscreen extent -3,-3.5 3,3.5, body extent -3,-5.15 3,5.15, height 7.55

## Part data
B1: library part MCD-00002, "Non-Open Push-Button 0.1A 24V", Manufacturer=WEALTHMETAL, Manufacturer_Part_Number=TD0341X-G01-BLU, ComponentLink1Description=Wealthmetal_Tact-Switch_TD0341.pdf, ComponentLink1URL=http://tunmcdsvn.tun.st.com/Component_Datasheet_Library/Trunk/Misc/Wealthmetal_Tact-Switch_TD0341.pdf, ECCN_EU=n/a, ECCN_US=n/a, Initial_Board_Reference=mb1274, Internal_Part_Number=MCD-00002, Order_Code_Farnell=535-930, Part_Type=Misc, Provided_By=Subcon, Status=Released
B2: library part MCD-00001, "Non-Open Push-Button 0.1A 24V", Manufacturer=WEALTHMETAL, Manufacturer_Part_Number=TD0341X-G01-BLA, ComponentLink1Description=Wealthmetal_Tact-Switch_TD0341.pdf, ComponentLink1URL=http://tunmcdsvn.tun.st.com/Component_Datasheet_Library/Trunk/Misc/Wealthmetal_Tact-Switch_TD0341.pdf, ECCN_EU=n/a, ECCN_US=n/a, Initial_Board_Reference=mb1274, Internal_Part_Number=MCD-00001, Order_Code_Farnell=535-930, Part_Type=Misc, Provided_By=Subcon, Status=Released
C1 C2 C3 C6 C9 C10 C12 C15 C16 C20 C21 C27 C28 C29 C31 C33: library part MCD-00211, "Capacitor, MLCC, 100nF, 16V, X7R, 10%, 0603, T=0,8mm", Manufacturer=YAGEO, Manufacturer_Part_Number=CC0603KRX7R7BB104, Package=C0603, ComponentLink1Description=Yageo_Capacitor_X7R-series.pdf, ComponentLink1URL=http://tunmcdsvn.tun.st.com/Component_Datasheet_Library/Trunk/Capacitors/Yageo_Capacitor_X7R-series.pdf, ECCN_EU=n/a, ECCN_US=n/a, Initial_Board_Reference=mb1319, Internal_Part_Number=MCD-00211, Part_Type=Capacitor, Provided_By=Subcon, Status=Released
C4 C5 C25 C26: library part MCD-00637, "Capacitor, MLCC, 10pF, 50V, NPO, 5%, 0603, T=0,8mm", Manufacturer=YAGEO, Manufacturer_Part_Number=CC0603JRNPO9BN100, Package=C0603, ComponentLink1Description=Yageo_Capacitor_NP0_16V-to-50V.pdf, ComponentLink1URL=http://tunmcdsvn.tun.st.com/Component_Datasheet_Library/Trunk/Capacitors/Yageo_Capacitor_NP0_16V-to-50V.pdf, ECCN_EU=n/a, ECCN_US=n/a, Initial_Board_Reference=mb1319, Internal_Part_Number=MCD-00637, Part_Type=Capacitor, Provided_By=subcon, Status=Released
C7 C13 C19 C22 C30: library part MCD-00010, "Capacitor, MLCC, 1uF, 16V, X5R, 10%, 0603, T=0,8mm", Manufacturer=YAGEO, Manufacturer_Part_Number=CC0603KRX5R7BB105, Package=C0603, ComponentLink1Description=Yageo_Capacitor_X5R-series.pdf, ComponentLink1URL=http://tunmcdsvn.tun.st.com/Component_Datasheet_Library/Trunk/Capacitors/Yageo_Capacitor_X5R-series.pdf, ECCN_EU=n/a, ECCN_US=n/a, Initial_Board_Reference=mb1274, Internal_Part_Number=MCD-00010, Part_Type=Capacitor, Provided_By=Subcon, Status=Released
C8: library part MCD-00238, "Capacitor, MLCC, 1uF, 6V3, X5R, 10%, 0603, T=0,8mm", Manufacturer=YAGEO, Manufacturer_Part_Number=CC0603KRX5R5BB105, Package=C0603, ComponentLink1Description=Yageo_Capacitor_X5R-series.pdf, ComponentLink1URL=http://tunmcdsvn.tun.st.com/Component_Datasheet_Library/Trunk/Capacitors/Yageo_Capacitor_X5R-series.pdf, ECCN_EU=n/a, ECCN_US=n/a, Initial_Board_Reference=mb1319, Internal_Part_Number=MCD-00238, Part_Type=Capacitor, Provided_By=Subcon, Status=Released
C11: library part MCD-00638, "Capacitor, MLCC, 20pF, 50V, NPO, 5%, 0603, T=0,8mm", Manufacturer=YAGEO, Manufacturer_Part_Number=CC0603JRNPO9BN200, Package=C0603, ComponentLink1Description=Yageo_Capacitor_NP0_16V-to-50V.pdf, ComponentLink1URL=http://tunmcdsvn.tun.st.com/Component_Datasheet_Library/Trunk/Capacitors/Yageo_Capacitor_NP0_16V-to-50V.pdf, ECCN_EU=n/a, ECCN_US=n/a, Initial_Board_Reference=mb1319, Internal_Part_Number=MCD-00638, Part_Type=Capacitor, Provided_By=Subcon, Status=Released
C14: library part MCD-00017, "Capacitor, MLCC, 10nF, 50V, X7R, 10%, 0603, T=0.8mm", Manufacturer=YAGEO, Manufacturer_Part_Number=CC0603KRX7R9BB103, Package=C0603, ComponentLink1Description=Yageo_Capacitor_X7R-series.pdf, ComponentLink1URL=http://tunmcdsvn.tun.st.com/Component_Datasheet_Library/Trunk/Capacitors/Yageo_Capacitor_X7R-series.pdf, ECCN_EU=n/a, ECCN_US=n/a, Initial_Board_Reference=mb1274, Internal_Part_Number=MCD-00017, Part_Type=Capacitor, Provided_By=Subcon, Status=Released
C17 C18: library part MCD-00014, "Capacitor, MLCC, 10uF, 25V, X5R, 10%, 0805, T=0,85mm", Manufacturer=YAGEO, Manufacturer_Part_Number=CC0805KRX5R8BB106, Package=C0805, ComponentLink1Description=Yageo_Capacitor_X5R-series.pdf, ComponentLink1URL=http://tunmcdsvn.tun.st.com/Component_Datasheet_Library/Trunk/Capacitors/Yageo_Capacitor_X5R-series.pdf, ECCN_EU=n/a, ECCN_US=n/a, Initial_Board_Reference=mb1274, Internal_Part_Number=MCD-00014, Part_Type=Capacitor, Provided_By=Subcon, Status=Released
C23 C24: library part MCD-00666, "Capacitor,5.6pF,0.1pF,16V,NPO,0603", Manufacturer=YAGEO, Manufacturer_Part_Number=CC0603BRNPO7BN5R6, Package=C0603, ComponentLink1Description=Yageo_Capacitor_NP0_16V-to-50V.pdf, ComponentLink1URL=http://tunmcdsvn.tun.st.com/Component_Datasheet_Library/Trunk/Capacitors/Yageo_Capacitor_NP0_16V-to-50V, ECCN_EU=n/a, ECCN_US=n/a, Initial_Board_Reference=MB1360, Internal_Part_Number=MCD-00666, Part_Type=Capacitor, Provided_By=Subcon, Status="Footprint available"
C32: library part MCD-00009, "Capacitor, MLCC, 4.7uF, 16V, X5R, 10%, 0603, T=0.8mm", Manufacturer=YAGEO, Manufacturer_Part_Number=CC0603KRX5R7BB475, Package=C0603, ComponentLink1Description=Yageo_Capacitor_X5R-series.pdf, ComponentLink1URL=http://tunmcdsvn.tun.st.com/Component_Datasheet_Library/Trunk/Capacitors/Yageo_Capacitor_X5R-series.pdf, ECCN_EU=n/a, ECCN_US=n/a, Initial_Board_Reference=mb1274, Internal_Part_Number=MCD-00009, Part_Type=Capacitor, Provided_By=subcon, Status=Released
CN2: library part MCD-00028, "USB-MICRO-B, 0.65mm, RA, SMT, Bottom Mount,", Manufacturer=MOLEX, Manufacturer_Part_Number=1050170001, ComponentLink1Description=Molex_Connector-USB-microB_105017-0001.pdf, ComponentLink1URL=http://tunmcdsvn.tun.st.com/Component_Datasheet_Library/Trunk/Connectors/Molex_Connector-USB-microB_105017-0001.pdf, ECCN_EU=n/a, ECCN_US=n/a, Initial_Board_Reference=mb1274, Internal_Part_Number=MCD-00028, Part_Type=Connector, Provided_By=Subcon, Status=Released
CN4: library part MCD-00313, "Header, 4x1, 2.54mm, VR, TH, Height 6mm/3mm", Manufacturer=JIUBABA, Manufacturer_Part_Number=PHFS25-11-04-G0B115-T-1, ComponentLink1Description=Juibaba_PHFS25-11XXXXXXXXXX.pdf, ComponentLink1URL=http://tunmcdsvn.tun.st.com/Component_Datasheet_Library/Trunk/Connectors/Juibaba_PHFS25-11XXXXXXXXXX.pdf, ECCN_EU=n/a, ECCN_US=n/a, Initial_Board_Reference=mb1311, Internal_Part_Number=MCD-00313, Part_Type=Connector, Provided_By=Subcon, Status=Released
CN5: library part MCD-00262, "Socket, 10x1, 2.54mm, VR, TH, Height 8.51mm/10mm", Manufacturer=SAMTEC, Manufacturer_Part_Number=SSW-110-03-x-S, ComponentLink1Description=Samtec_SSW-SSQ-series.pdf, ComponentLink1URL=http://tunmcdsvn.tun.st.com/Component_Datasheet_Library/Trunk/Connectors/Samtec_SSW-SSQ-series.pdf, ECCN_EU=n/a, ECCN_US=n/a, Initial_Board_Reference=mb1319, Internal_Part_Number=MCD-00262, Part_Type=Connector, Provided_By=Subcon, Status=Released
CN6 CN9: library part MCD-00261, "Socket, 8x1, 2.54mm, VR, TH, Height 8.51mm/10mm", Manufacturer=SAMTEC, Manufacturer_Part_Number=SSW-108-03-x-S, ComponentLink1Description=Samtec_SSW-SSQ-series.pdf, ComponentLink1URL=http://tunmcdsvn.tun.st.com/Component_Datasheet_Library/Trunk/Connectors/Samtec_SSW-SSQ-series.pdf, ECCN_EU=n/a, ECCN_US=n/a, Initial_Board_Reference=mb1319, Internal_Part_Number=MCD-00261, Part_Type=Connector, Provided_By=Subcon, Status=Released
CN7 CN10: library part MCD-00213, "Header, 19x2, 2,54mm, VR, TH, Height 5.84mm/10.16mm", Manufacturer=SAMTEC, Manufacturer_Part_Number=TSW-119-09-x-D, ComponentLink1Description=Samtec_connector_TSW-HTSW-series.pdf, ComponentLink1URL=http://tunmcdsvn.tun.st.com/Component_Datasheet_Library/Trunk/Connectors/Samtec_connector_TSW-HTSW-series.pdf, ECCN_EU=n/a, ECCN_US=n/a, Initial_Board_Reference=mb1319, Internal_Part_Number=MCD-00213, Part_Type=Connector, Provided_By=Subcon, Status=Released
CN8: library part MCD-00260, "Socket, 6x1, 2.54mm, VR, TH, Height 8.51mm/10mm", Manufacturer=SAMTEC, Manufacturer_Part_Number=SSW-106-03-x-S, ComponentLink1Description=Samtec_SSW-SSQ-series.pdf, ComponentLink1URL=http://tunmcdsvn.tun.st.com/Component_Datasheet_Library/Trunk/Connectors/Samtec_SSW-SSQ-series.pdf, ECCN_EU=n/a, ECCN_US=n/a, Initial_Board_Reference=mb1319, Internal_Part_Number=MCD-00260, Part_Type=Connector, Provided_By=Subcon, Status=Released
CN11: library part MCD-00316, "Header, 6x1, 2.54mm, VR, TH, Height 6mm/3mm", Manufacturer=JIUBABA, Manufacturer_Part_Number=PHFS25-11-06-G0B115-T-1, ComponentLink1Description=Juibaba_PHFS25-11XXXXXXXXXX.pdf, ComponentLink1URL=http://tunmcdsvn.tun.st.com/Component_Datasheet_Library/Trunk/Connectors/Juibaba_PHFS25-11XXXXXXXXXX.pdf, ECCN_EU=n/a, ECCN_US=n/a, Initial_Board_Reference=mb1311, Internal_Part_Number=MCD-00316, Part_Type=Connector, Provided_By=Subcon, Status=Released
D1 D2 D3 D4 D5: library part MCD-00034, Manufacturer=STMICROELECTRONICS, ComponentLink1Description=STM_Diode_BAT60JFILM-SOD323.pdf, ECCN_EU=NEC, ECCN_US=EAR99, Initial_Board_Reference=mb1274, Internal_Part_Number=MCD-00034, Manufacturer_Part_Number=BAT60JFILM, Part_Type=Diode, Provided_By=Subcon, Status=Released
  D1 D3 D4 D5: ComponentLink1URL=http://tunmcdsvn.tun.st.com/Component_Datasheet_Library/Trunk/Diodes/STM_Diode_BAT60JFILM-SOD323.pdf
JP1 JP6: library part MCD-00045, "Header, 2x1, 2,54mm, VR, TH, Height 5.84mm/2.54mm", Manufacturer=SAMTEC, Manufacturer_Part_Number=TSW-102-07-x-S, ComponentLink1Description=Samtec_connector_TSW-HTSW-series.pdf, ComponentLink1URL=http://tunmcdsvn.tun.st.com/Component_Datasheet_Library/Trunk/Connectors/Samtec_connector_TSW-HTSW-series.pdf, ECCN_EU=n/a, ECCN_US=n/a, Initial_Board_Reference=mb1274, Internal_Part_Number=MCD-00045, Part_Type=Connector, Provided_By=Subcon, Status=Released
JP2: library part MCD-00686, "Header, 4x2, 2,54mm, VR, TH, Height 5.84mm/2.54mm - Shunt Fitted 1-2", Manufacturer=SAMTEC, Manufacturer_Part_Number=TSW-104-07-x-D, ComponentLink1Description=Samtec_TSW-HTSW-series.pdf, ComponentLink1URL=http://tunmcdsvn.tun.st.com/Component_Datasheet_Library/Trunk/Connectors/Samtec_TSW-HTSW-series, ECCN_EU=n/a, ECCN_US=n/a, Initial_Board_Reference=MB1331, Internal_Part_Number=MCD-00686, Part_Type=Connector, Provided_By=Subcon, Status="Symbol available"
JP3 JP4 JP5: library part MCD-00683, "Header, 2x1, 2,54mm, VR, TH, Height 5.84mm/2.54mm - Shunt Fitted by default", Manufacturer=SAMTEC, Manufacturer_Part_Number=TSW-102-07-x-S, ComponentLink1Description=Samtec_connector_TSW-HTSW-series.pdf, ComponentLink1URL=http://tunmcdsvn.tun.st.com/Component_Datasheet_Library/Trunk/Connectors/Samtec_TSW-HTSW-series, ECCN_EU=n/a, ECCN_US=n/a, Initial_Board_Reference=MB1331, Internal_Part_Number=MCD-00683, Part_Type=Connector, Provided_By=Subcon, Status=Released
L1: library part MCD-00047, "SMD Chip ferrite bead, 600R@100MHz +/-25%, 350mA, 500mohm DC, 0603, T=0.8mm", Manufacturer=TAI-TECH, Manufacturer_Part_Number=FCM1608KF-601T03, ComponentLink1Description=TaiTech_Bead_FCM1608_series.pdf, ComponentLink1URL=http://tunmcdsvn.tun.st.com/Component_Datasheet_Library/Trunk/Inductors/TaiTech_Bead_FCM1608_series.pdf, ECCN_EU=n/a, ECCN_US=n/a, Initial_Board_Reference=mb1274, Internal_Part_Number=MCD-00047, Part_Type=Inductor, Provided_By=Subcon, Status=Released
LD1: library part MCD-00051, "LED Bicolor", Alternate_Manufacturer=EVERLUCK, Alternate_Manufacturer_Part_Number=LE-RGW35280, Manufacturer="AVAGO TECHNOLOGIES", Manufacturer_Part_Number=HSMF-A201-A00J1, ComponentLink1Description=Avago_LED-SMC_HSMx-A2xx-02Feb2012.pdf, ComponentLink1URL=http://tunmcdsvn.tun.st.com/Component_Datasheet_Library/Trunk/display/Avago_LED-SMC_HSMx-A2xx-02Feb2012.pdf, ECCN_EU=NEC, ECCN_US=EAR99, Initial_Board_Reference=mb1274, Internal_Part_Number=MCD-00051, Part_Type=Display, Provided_By=Subcon, Status=Released
LD2: library part MCD-00049, "LED, Red, 0603", Manufacturer=EVERLIGHT, Manufacturer_Part_Number=19-213-R6C-AP1Q2B/3T, ComponentLink1Description=Everlight_SMD-LED-RED_19-213-R6C-AP1Q2B-3T-V3.doc.pdf, ComponentLink1URL=http://tunmcdsvn.tun.st.com/Component_Datasheet_Library/Trunk/display/Everlight_SMD-LED-RED_19-213-R6C-AP1Q2B-3T-V3.doc.pdf, ECCN_EU=NEC, ECCN_US=EAR99, Initial_Board_Reference=mb1274, Internal_Part_Number=MCD-00049, Part_Type=Display, Provided_By=Subcon, Status=Released
LD3 LD4: library part MCD-00050, "LED, Green, 0603", Manufacturer=EVERLIGHT, Manufacturer_Part_Number=19-213SYGC/S530-E2/TR8, ComponentLink1Description=Everlight_SMD-LED-GREEN_19-213SYGC-S530-XX-TR8-v3.doc.pdf, ComponentLink1URL=http://tunmcdsvn.tun.st.com/Component_Datasheet_Library/Trunk/display/Everlight_SMD-LED-GREEN_19-213SYGC-S530-XX-TR8-v3.doc.pdf, ECCN_EU=NEC, ECCN_US=EAR99, Initial_Board_Reference=mb1274, Internal_Part_Number=MCD-00050, Part_Type=Display, Provided_By=Subcon, Status=Released
R1 R3 R4 R11: library part MCD-00220, "Resistor,10K,0603,1%,1/10W", Manufacturer=YAGEO, Manufacturer_Part_Number=RC0603FR-0710KL, Package=R0603, ComponentLink1Description=Yageo_Resistor_RC0603-series.pdf, ComponentLink1URL=http://tunmcdsvn.tun.st.com/Component_Datasheet_Library/Trunk/Resistors/Yageo_Resistor_RC0603-series.pdf, ECCN_EU=n/a, ECCN_US=n/a, Initial_Board_Reference=mb1319, Internal_Part_Number=MCD-00220, Part_Type=Resistor, Provided_By=Subcon, Status=Released
R2 R9 R16 R17 R19: library part MCD-00066, "Resistor,22R,0603,1%,1/10W", Manufacturer=YAGEO, Manufacturer_Part_Number=RC0603FR-0722RL, Package=R0603, ComponentLink1Description=Yageo_Resistor_RC0603-series.pdf, ComponentLink1URL=http://tunmcdsvn.tun.st.com/Component_Datasheet_Library/Trunk/Resistors/Yageo_Resistor_RC0603-series.pdf, ECCN_EU=n/a, ECCN_US=n/a, Initial_Board_Reference=mb1274, Internal_Part_Number=MCD-00066, Part_Type=Resistor, Provided_By=Subcon, Status=Released
R5 R8: library part MCD-00223, "Resistor,100K,0603,1%,1/10W", Manufacturer=YAGEO, Manufacturer_Part_Number=RC0603FR-07100KL, Package=R0603, ComponentLink1Description=Yageo_Resistor_RC0603-series.pdf, ComponentLink1URL=http://tunmcdsvn.tun.st.com/Component_Datasheet_Library/Trunk/Resistors/Yageo_Resistor_RC0603-series.pdf, ECCN_EU=n/a, ECCN_US=n/a, Initial_Board_Reference=mb1319, Internal_Part_Number=MCD-00223, Part_Type=Resistor, Provided_By=Subcon, Status=Released
R6 R21 R22 R29: library part MCD-00219, "Resistor,4K7,0603,1%,1/10W", Manufacturer=YAGEO, Manufacturer_Part_Number=RC0603FR-074K7L, Package=R0603, ComponentLink1Description=Yageo_Resistor_RC0603-series.pdf, ComponentLink1URL=http://tunmcdsvn.tun.st.com/Component_Datasheet_Library/Trunk/Resistors/Yageo_Resistor_RC0603-series.pdf, ECCN_EU=n/a, ECCN_US=n/a, Initial_Board_Reference=mb1319, Internal_Part_Number=MCD-00219, Part_Type=Resistor, Provided_By=Subcon, Status=Released
R7: library part MCD-00218, "Resistor,2K7,0603,1%,1/10W", Manufacturer=YAGEO, Manufacturer_Part_Number=RC0603FR-072K7L, Package=R0603, ComponentLink1Description=Yageo_Resistor_RC0603-series.pdf, ComponentLink1URL=http://tunmcdsvn.tun.st.com/Component_Datasheet_Library/Trunk/Resistors/Yageo_Resistor_RC0603-series.pdf, ECCN_EU=n/a, ECCN_US=n/a, Initial_Board_Reference=mb1319, Internal_Part_Number=MCD-00218, Part_Type=Resistor, Provided_By=Subcon, Status=Released
R10: library part MCD-00217, "Resistor,1K5,0603,1%,1/10W", Manufacturer=YAGEO, Manufacturer_Part_Number=RC0603FR-071K5L, Package=R0603, ComponentLink1Description=Yageo_Resistor_RC0603-series.pdf, ComponentLink1URL=http://tunmcdsvn.tun.st.com/Component_Datasheet_Library/Trunk/Resistors/Yageo_Resistor_RC0603-series.pdf, ECCN_EU=n/a, ECCN_US=n/a, Initial_Board_Reference=mb1319, Internal_Part_Number=MCD-00217, Part_Type=Resistor, Provided_By=Subcon, Status=Released
R12: library part MCD-00221, "Resistor,36K,0603,1%,1/10W", Manufacturer=YAGEO, Manufacturer_Part_Number=RC0603FR-0736KL, Package=R0603, ComponentLink1Description=Yageo_Resistor_RC0603-series.pdf, ComponentLink1URL=http://tunmcdsvn.tun.st.com/Component_Datasheet_Library/Trunk/Resistors/Yageo_Resistor_RC0603-series.pdf, ECCN_EU=n/a, ECCN_US=n/a, Initial_Board_Reference=mb1319, Internal_Part_Number=MCD-00221, Part_Type=Resistor, Provided_By=Subcon, Status=Released
R13 R20 R23 R26 R33 R34: library part MCD-00224, "Resistor,100R,0603,1%,1/10W", Manufacturer=YAGEO, Manufacturer_Part_Number=RC0603FR-07100RL, Package=R0603, ComponentLink1Description=Yageo_Resistor_RC0603-series.pdf, ComponentLink1URL=http://tunmcdsvn.tun.st.com/Component_Datasheet_Library/Trunk/Resistors/Yageo_Resistor_RC0603-series.pdf, ECCN_EU=n/a, ECCN_US=n/a, Initial_Board_Reference=mb1319, Internal_Part_Number=MCD-00224, Part_Type=Resistor, Provided_By=Subcon, Status=Released
R14 R15: library part MCD-00197, "Resistor,330R,0603,1%,1/10W", Manufacturer=YAGEO, Manufacturer_Part_Number=RC0603FR-07330RL, Package=R0603, ComponentLink1Description=Yageo_Resistor_RC0603-series.pdf, ComponentLink1URL=http://tunmcdsvn.tun.st.com/Component_Datasheet_Library/Trunk/Resistors/Yageo_Resistor_RC0603-series, ECCN_EU=n/a, ECCN_US=n/a, Internal_Part_Number=MCD-00197, Part_Type=Resistor, Provided_By=Subcon, Status=Released
R18 R27 R30: library part MCD-00070, "Resistor,1K,0603,1%,1/10W", Manufacturer=YAGEO, Manufacturer_Part_Number=RC0603FR-071KL, Package=R0603, ComponentLink1Description=Yageo_Resistor_RC0603-series.pdf, ComponentLink1URL=http://tunmcdsvn.tun.st.com/Component_Datasheet_Library/Trunk/Resistors/Yageo_Resistor_RC0603-series.pdf, ECCN_EU=n/a, ECCN_US=n/a, Initial_Board_Reference=mb1274, Internal_Part_Number=MCD-00070, Part_Type=Resistor, Provided_By=Subcon, Status=Released
R24 R36: library part MCD-00222, "Resistor,47K,0603,1%,1/10W", Manufacturer=YAGEO, Manufacturer_Part_Number=RC0603FR-0747KL, Package=R0603, ComponentLink1Description=Yageo_Resistor_RC0603-series.pdf, ComponentLink1URL=http://tunmcdsvn.tun.st.com/Component_Datasheet_Library/Trunk/Resistors/Yageo_Resistor_RC0603-series, ECCN_EU=n/a, ECCN_US=n/a, Initial_Board_Reference=MB1319, Internal_Part_Number=MCD-00222, Part_Type=Resistor, Provided_By=Subcon, Status=Released
R28: library part MCD-00225, "Resistor,510R,0603,1%,1/10W", Manufacturer=YAGEO, Manufacturer_Part_Number=RC0603FR-07510RL, Package=R0603, ComponentLink1Description=Yageo_Resistor_RC0603-series.pdf, ComponentLink1URL=http://tunmcdsvn.tun.st.com/Component_Datasheet_Library/Trunk/Resistors/Yageo_Resistor_RC0603-series.pdf, ECCN_EU=n/a, ECCN_US=n/a, Initial_Board_Reference=mb1319, Internal_Part_Number=MCD-00225, Part_Type=Resistor, Provided_By=Subcon, Status=Released
R31 R32: library part MCD-00181, "Resistor,0R,0603,ULO", Manufacturer=ROHM, Manufacturer_Part_Number=PMR03EZPJ000, Package=R0603, ComponentLink1Description="ROHM_ULtra low Ohmic Resistor _PMR10EZPJ000.pdf", ComponentLink1URL="http://tunmcdsvn.tun.st.com/Component_Datasheet_Library/Trunk/Resistors/ROHM_ULtra low Ohmic Resistor _PMR10EZPJ000.pdf", ECCN_EU=n/a, ECCN_US=n/a, Internal_Part_Number=MCD-00181, Part_Type=Resistor, Provided_By=Subcon, Status=Released
R35: library part MCD-00257, "Resistor,1M,0603,1%,1/10W", Manufacturer=YAGEO, Manufacturer_Part_Number=RC0603FR-071ML, Package=R0603, ComponentLink1Description=Yageo_Resistor_RC0603-series.pdf, ComponentLink1URL=http://tunmcdsvn.tun.st.com/Component_Datasheet_Library/Trunk/Resistors/Yageo_Resistor_RC0603-series.pdf, ECCN_EU=n/a, ECCN_US=n/a, Initial_Board_Reference=mb1319, Internal_Part_Number=MCD-00257, Part_Type=Resistor, Provided_By=Subcon, Status=Released
SB1 SB3 SB4 SB7 SB9 SB11 SB13 SB14 SB16 SB17 SB18 SB19 SB20 SB22 SB25 SB26 SB27 SB28 SB31: library part MCD-00071, "Solder Bridge ON", ECCN_EU=n/a, ECCN_US=n/a, Initial_Board_Reference=mb1274, Internal_Part_Number=MCD-00071, Part_Type=Mechanical, Provided_By=Subcon, Status=Released
SB2 SB5 SB6 SB8 SB10 SB12 SB15 SB21 SB23 SB24 SB29 SB30: library part MCD-00072, "Solder Bridge OFF", ECCN_EU=n/a, ECCN_US=n/a, Initial_Board_Reference=mb1274, Internal_Part_Number=MCD-00072, Part_Type=Mechanical, Provided_By=n/a, Status=Released
T1: library part MCD-00073, "NPN Bipolar Transistor", Manufacturer=NXP, Manufacturer_Part_Number=BSR14, ComponentLink1Description=NXP_Transistor_BSR14.pdf, ComponentLink1URL=http://tunmcdsvn.tun.st.com/Component_Datasheet_Library/Trunk/IC/NXP_Transistor_BSR14.pdf, ECCN_EU=NEC, ECCN_US=EAR99, Initial_Board_Reference=mb1274, Internal_Part_Number=MCD-00073, Part_Type=IC, Provided_By=Subcon, Status=Released
T2: library part MCD-00151, "N-channel enhancement mode field-effect transistor", Manufacturer=NXP, ComponentLink1Description=NXP_Transistor_BSN20BK_SOT23.pdf, ComponentLink1URL=http://tunmcdsvn.tun.st.com/Component_Datasheet_Library/Trunk/IC/NXP_Transistor_BSN20BK_SOT23.pdf, ECCN_EU=NEC, ECCN_US=EAR99, Initial_Board_Reference=mb1262, Internal_Part_Number=MCD-00151, Manufacturer_Part_Number=BSN20, Part_Type=IC, Provided_By=Subcon, Status=Released
U1: library part MCD-00163, "Very low capacitance ESD protection", Manufacturer=STMICROELECTRONICS, ComponentLink1Description=STM_ESD_USBLC6-2.pdf, ComponentLink1URL=http://tunmcdsvn.tun.st.com/Component_Datasheet_Library/Trunk/Diodes/STM_ESD_USBLC6-2.pdf, ECCN_EU=NEC, ECCN_US=EAR99, Initial_Board_Reference=mb1263, Internal_Part_Number=MCD-00163, Manufacturer_Part_Number=USBLC6-2SC6, Part_Type=IC, Provided_By=Subcon, Status=Released
U2: library part MCD-00085, "Medium-density performance line ARM-based 32-bit MCU with 128KB Flash", Manufacturer=STMICROELECTRONICS, ComponentLink1Description=STM_STM32F103CBT6.pdf, ComponentLink1URL=http://tunmcdsvn.tun.st.com/Component_Datasheet_Library/Trunk/IC/STM_STM32F103CBT6.pdf, ECCN_EU=NEC, ECCN_US=3A991A2, Initial_Board_Reference=mb1274, Internal_Part_Number=MCD-00085, Manufacturer_Part_Number=STM32F103CBT6, Part_Type=IC, Provided_By=Subcon, Status=Released
U3: library part MCD-00663, "200 mA low quiescent current very low noise LDO", Manufacturer=STMICROELECTRONICS, Package=SOT23-5L, ComponentLink1Description=STM_LDO_LDK120M33R.pdf, ComponentLink1URL=http://tunmcdsvn.tun.st.com/Component_Datasheet_Library/Trunk/IC/STM_LDO_LDK120M33R.pdf, ECCN_EU=NEC, ECCN_US=EAR99, Initial_Board_Reference=MB1360, Internal_Part_Number=MCD-00663, Manufacturer_Part_Number=LDK120M33R, Part_Type=IC, Provided_By=Subcon, Status="Footprint available"
U4: library part MCD-00083, "Enhanced single channel power switches", Manufacturer=STMICROELECTRONICS, Manufacturer_Part_Number=STMPS2141STR, ComponentLink1Description=STM_PWR-Switch_STMPS2141STR.pdf, ComponentLink1URL=http://tunmcdsvn.tun.st.com/Component_Datasheet_Library/Trunk/IC/STM_PWR-Switch_STMPS2141STR, ECCN_EU=NEC, ECCN_US=EAR99, Initial_Board_Reference=MB1274, Internal_Part_Number=MCD-00083, Part_Type=IC, Provided_By=Subcon, Status=Released
U5: library part MCD-00088, "IC REG LDO 5V 0.8A SOT223", Manufacturer=STMICROELECTRONICS, ComponentLink1Description=STM_LDO_LD1117.pdf, ComponentLink1URL=http://tunmcdsvn.tun.st.com/Component_Datasheet_Library/Trunk/IC/STM_LDO_LD1117.pdf, ECCN_EU=NEC, ECCN_US=EAR99, Initial_Board_Reference=mb1274, Internal_Part_Number=MCD-00088, Manufacturer_Part_Number=LD1117S50TR, Part_Type=IC, Provided_By=Subcon, Status=Released
U6: library part MCD-00664, "1.2 A low quiescent current LDO with reverse current protection", Manufacturer=STMICROELECTRONICS, Package=DFN6, ComponentLink1Description=STM_LDO_LDL112PV33R.pdf, ComponentLink1URL=http://tunmcdsvn.tun.st.com/Component_Datasheet_Library/Trunk/IC/STM_LDO_LDL112PV33R.pdf, ECCN_EU=NEC, ECCN_US=EAR100, Initial_Board_Reference=MB1360, Internal_Part_Number=MCD-00664, Manufacturer_Part_Number=LDL112PV33R, Part_Type=IC, Provided_By=Subcon, Status="Footprint available"
U7: library part MCD-00662, "Medium-density performance line ARM-based 32-bit MCU with 128KB Flash", Manufacturer=STMICROELECTRONICS, Package=LQFP64, ComponentLink1Description="STM_POA_ LQFP 10x10 64L.pdf", ComponentLink1URL="http://tunmcdsvn.tun.st.com/Component_Datasheet_Library/Trunk/IC/STM_POA_ LQFP 10x10 64L.pdf", ECCN_EU=NEC, ECCN_US=3A991A2, Initial_Board_Reference=MB1360, Internal_Part_Number=MCD-00662, Manufacturer_Part_Number=STM32G071RBT6, Part_Type=IC, Provided_By=STM, Status="Footprint available"
X1 X3: library part MCD-00092, "Crystal 8Mhz, 8pF, -+50PPM, SMD", Manufacturer=NDK, Manufacturer_Part_Number="NX3225GD 8MHz EXS00A-CG04874", ComponentLink1Description="NDK_Crystal-For-ST_NX3225GD 8MHz EXS00A-CG04874 (EXS10B-20725).pdf", ComponentLink1URL="http://tunmcdsvn.tun.st.com/Component_Datasheet_Library/Trunk/Crystal_Osc/NDK_Crystal-For-ST_NX3225GD 8MHz EXS00A-CG04874 (EXS10B-20725).pdf", ECCN_EU=NEC, ECCN_US=EAR99, Initial_Board_Reference=mb1274, Internal_Part_Number=MCD-00092, Part_Type=Crystal_Osc, Provided_By=STM, Status=Released
X2: library part MCD-00091, "Crystal 32.768kHz, 6pF, -+20PPM, R=50K, SMD", Manufacturer=NDK, Manufacturer_Part_Number="NX3215SA 32.768KHz EXS00A-MU00525", ComponentLink1Description="NDK_Crystal-For-ST_NX3215SA 32.768KHz EXS00A-MU00525 (EXS10B-21238).pdf", ComponentLink1URL="http://tunmcdsvn.tun.st.com/Component_Datasheet_Library/Trunk/Crystal_Osc/NDK_Crystal-For-ST_NX3215SA 32.768KHz EXS00A-MU00525 (EXS10B-21238).pdf", ECCN_EU=NEC, ECCN_US=EAR99, Initial_Board_Reference=mb1274, Internal_Part_Number=MCD-00091, Part_Type=Crystal_Osc, Provided_By=STM, Status=Released

## Free pads (board coordinates)
  round 125.98 hole 125.98 unplated: 0(0,1950) 0(1300,-100) 0(1900,1900)

## Via types
v1: diameter 15, hole 8, Top Layer to Bottom Layer, tented both sides, 398 vias
v2: diameter 20, hole 12, Top Layer to Bottom Layer, tented both sides, 18 vias

## Nets (pads, with @x,y where several pads share a name; then routed paths per layer and width w, separated by ;. In a path a pad name is that pad's centre, name@x,y a point inside that pad or via, vN(x,y) a via of type N, cw(c..) or ccw(c..) an arc to the next point about the centre after c; other vN are vias at no path point)
3V3: CN6.2 CN6.4 CN7.12 CN7.16 JP3.2 R22.1 R28.2 SB1.2 | length 4892.2
  Top Layer w10: v1(726.43,2143.44) R22.1@774,2143.44 ; v1(1071.95,1586) 1017.13,1586 975,1543.87 JP3.2@975,1475 1151,1475 1189,1437 v1(1413,1437) ; v1(1757,1787) R28.2@1757,1813.74
  Top Layer w20: CN7.16@-200,1100 CN6.4@0,1100 43,1100 79,1136 79,1270 49,1300 CN6.2@0,1300 CN7.12@-200,1300 ; v2(572,1297) 787,1297 823.25,1333.25 1109,1333.25 ; 975,1335 JP3.2@975,1475
  Bottom Layer w10: v1(726.43,2143.44) 320.48,2143.44 262,2084.96 262,1918.04 381.04,1799 858.95,1799 v1(1071.95,1586) ; v1(1413,1437) 1414.5,1438.5 1586.5,1438.5 1645,1497 1645,1606.46 1757,1718.46 v1(1757,1787)
  Bottom Layer w20: CN6.2@0,1300 3,1297 v2(572,1297)
3V3_STLK: C1.2 C2.2 C6.2 C7.2 C10.2 C15.2 LD1.4 SB6.2 SB15.1 T1.3 U2.1 U2.9 U2.24 U2.36 U2.48 U3.5 | length 4750